# Altium PCB XEM7310_Breakout.PcbDoc (part 1 of 3)
Units mm, origin at the board's own origin, x right, y up, seen from the top; angles counter-clockwise.
Board outline 151.89 x 165.35 mm, 4 copper layers (Top, Ground Plane, Power Plane, Bottom), stack 1.562 mm thick; 68 components, 204 nets, 832 pads, 382 vias.
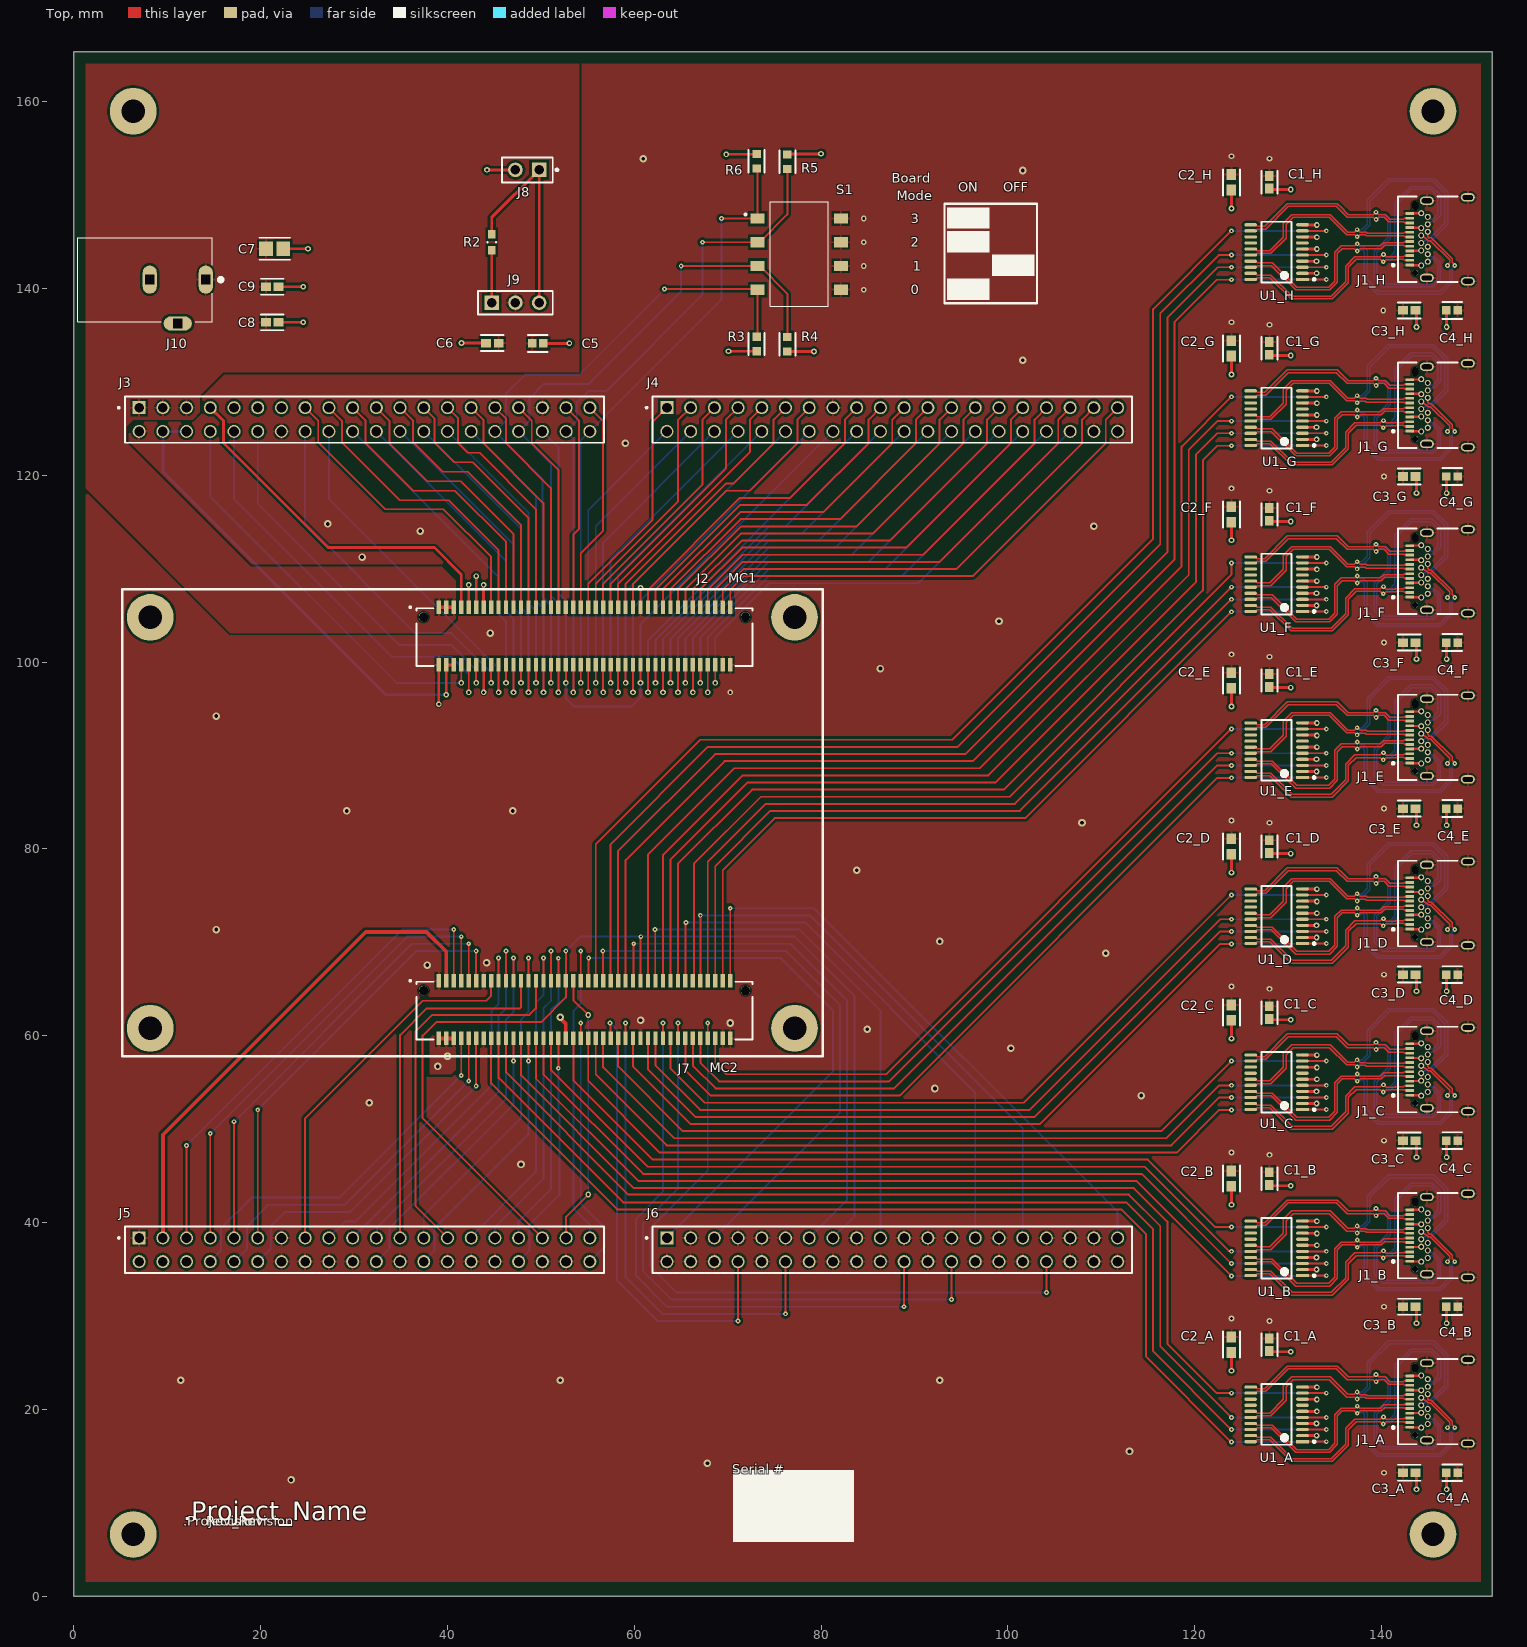
[diagram p0: Top view]
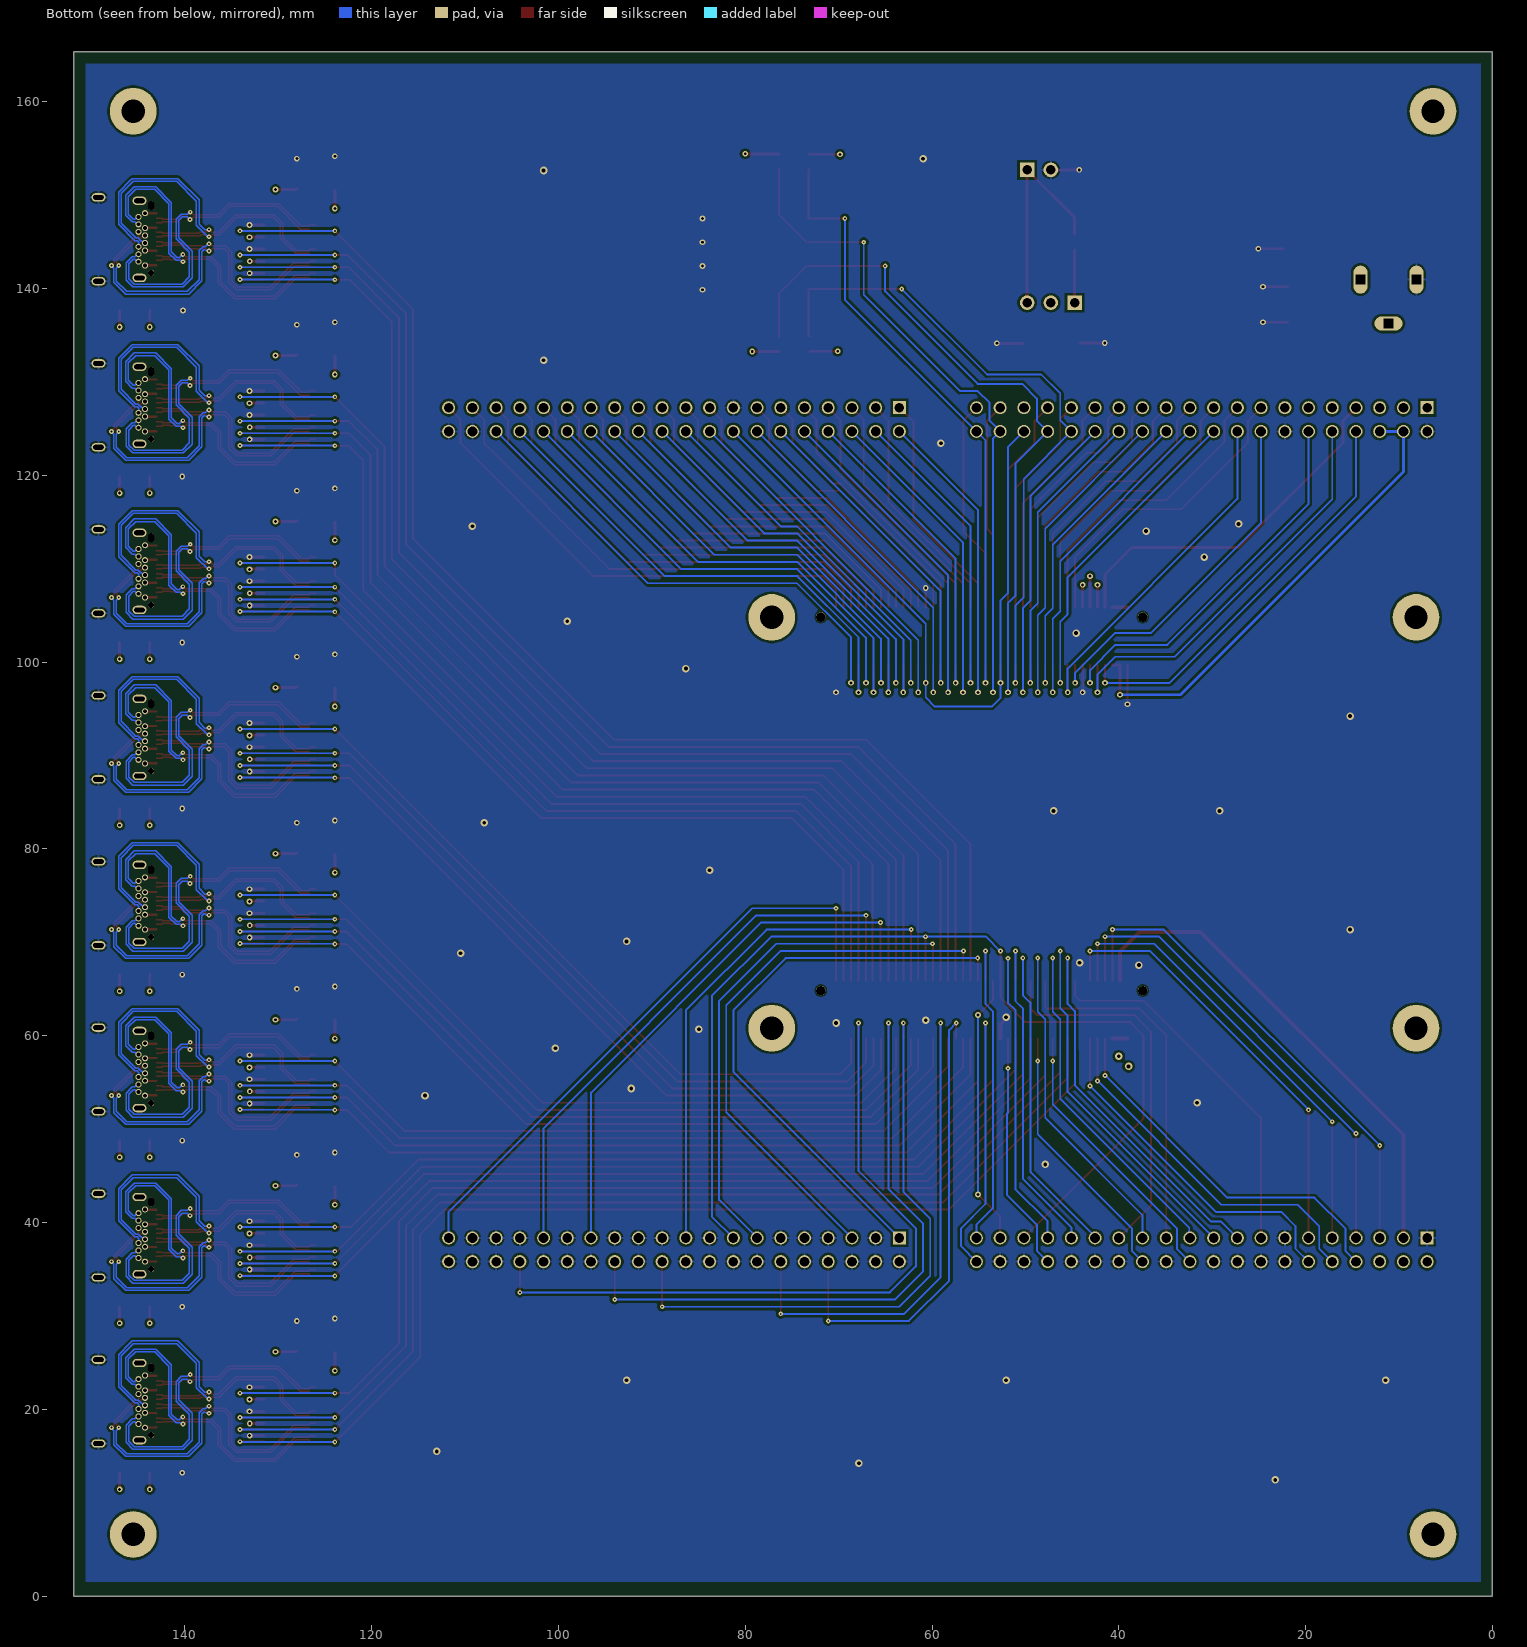
[diagram p1: Bottom view, seen from below]
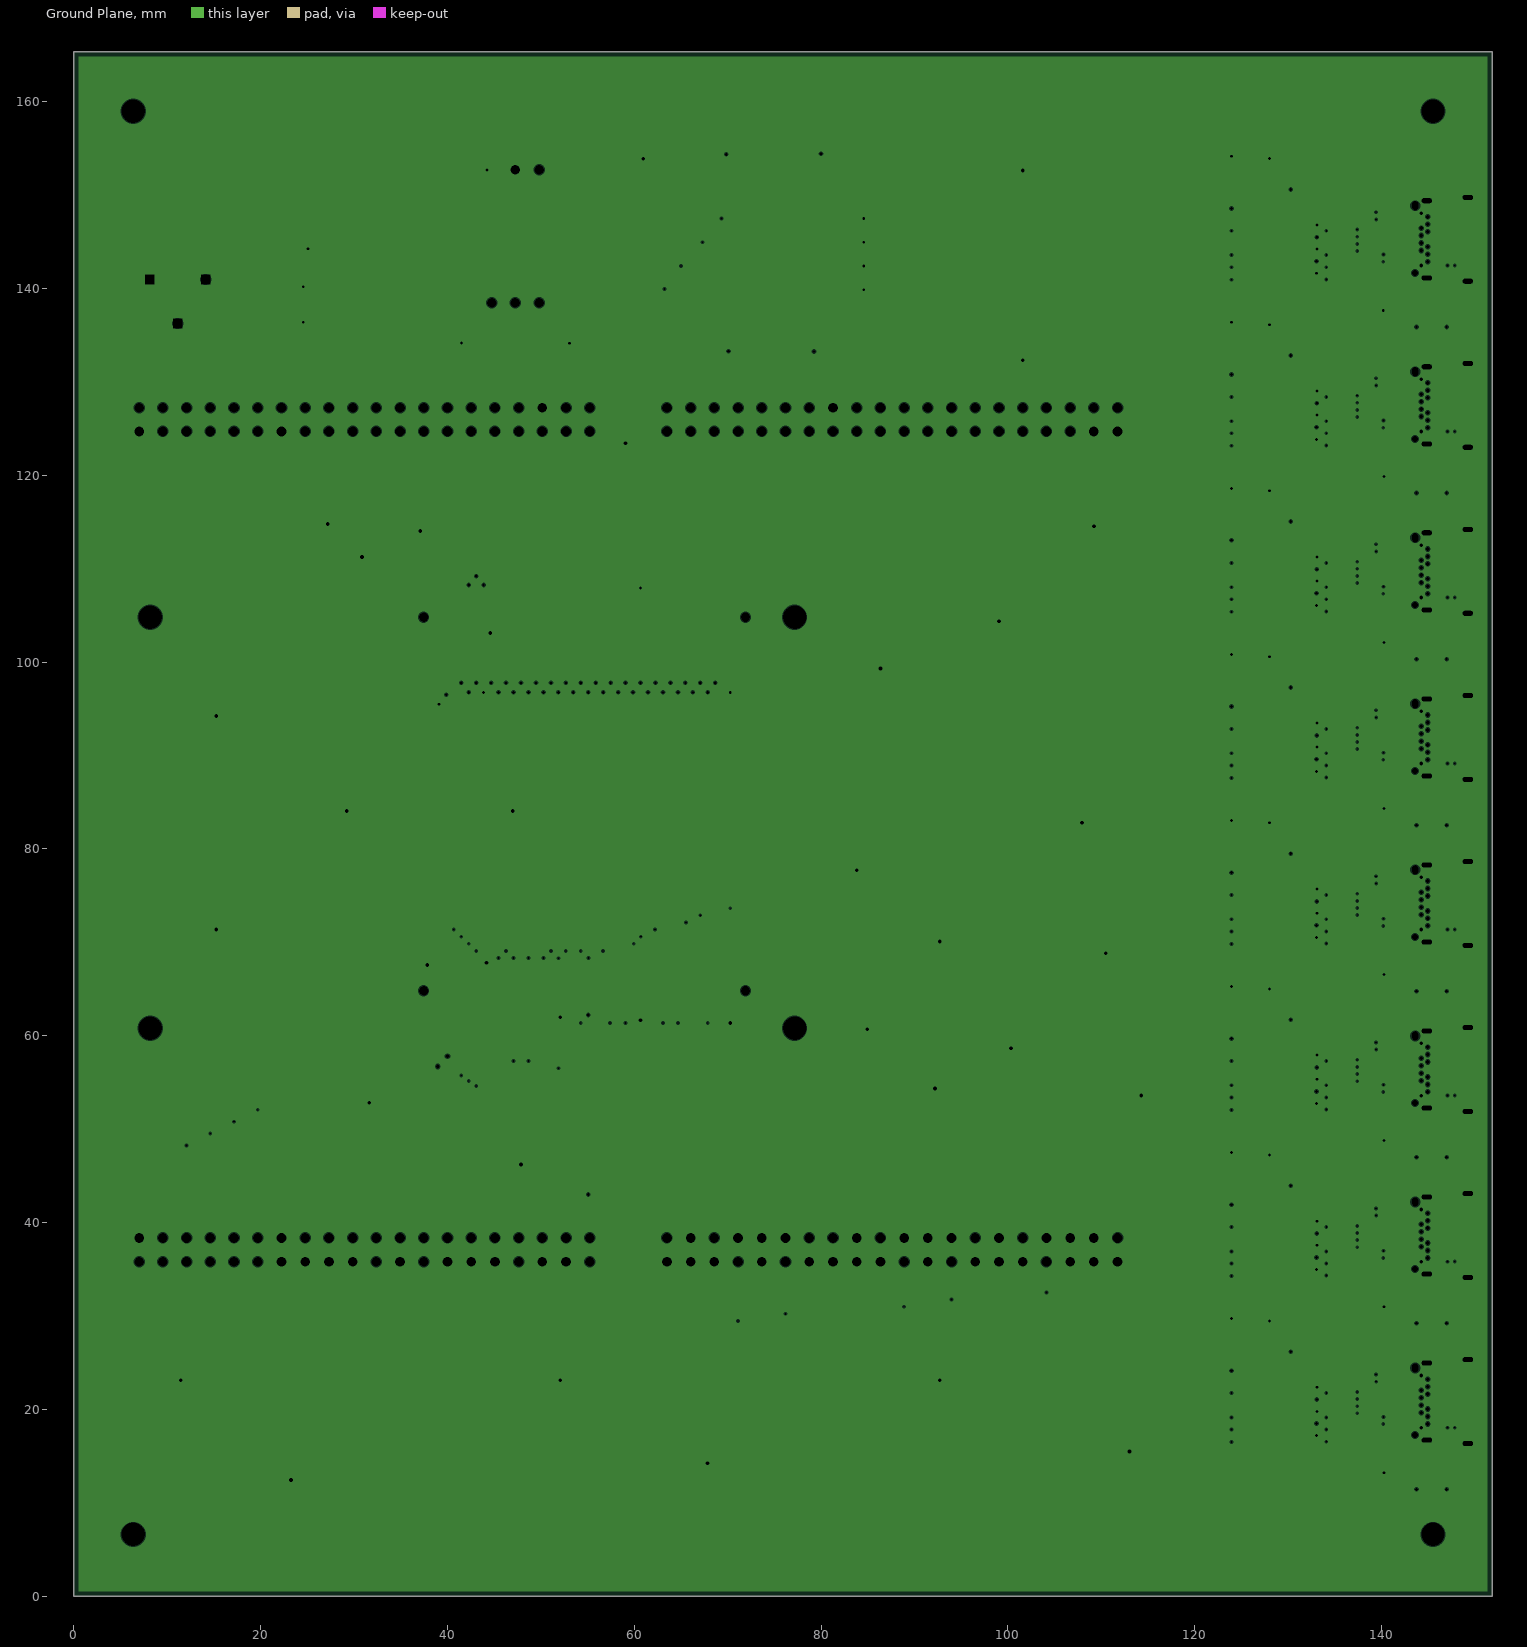
[diagram p2: Ground Plane, clearances drawn from the general rule]
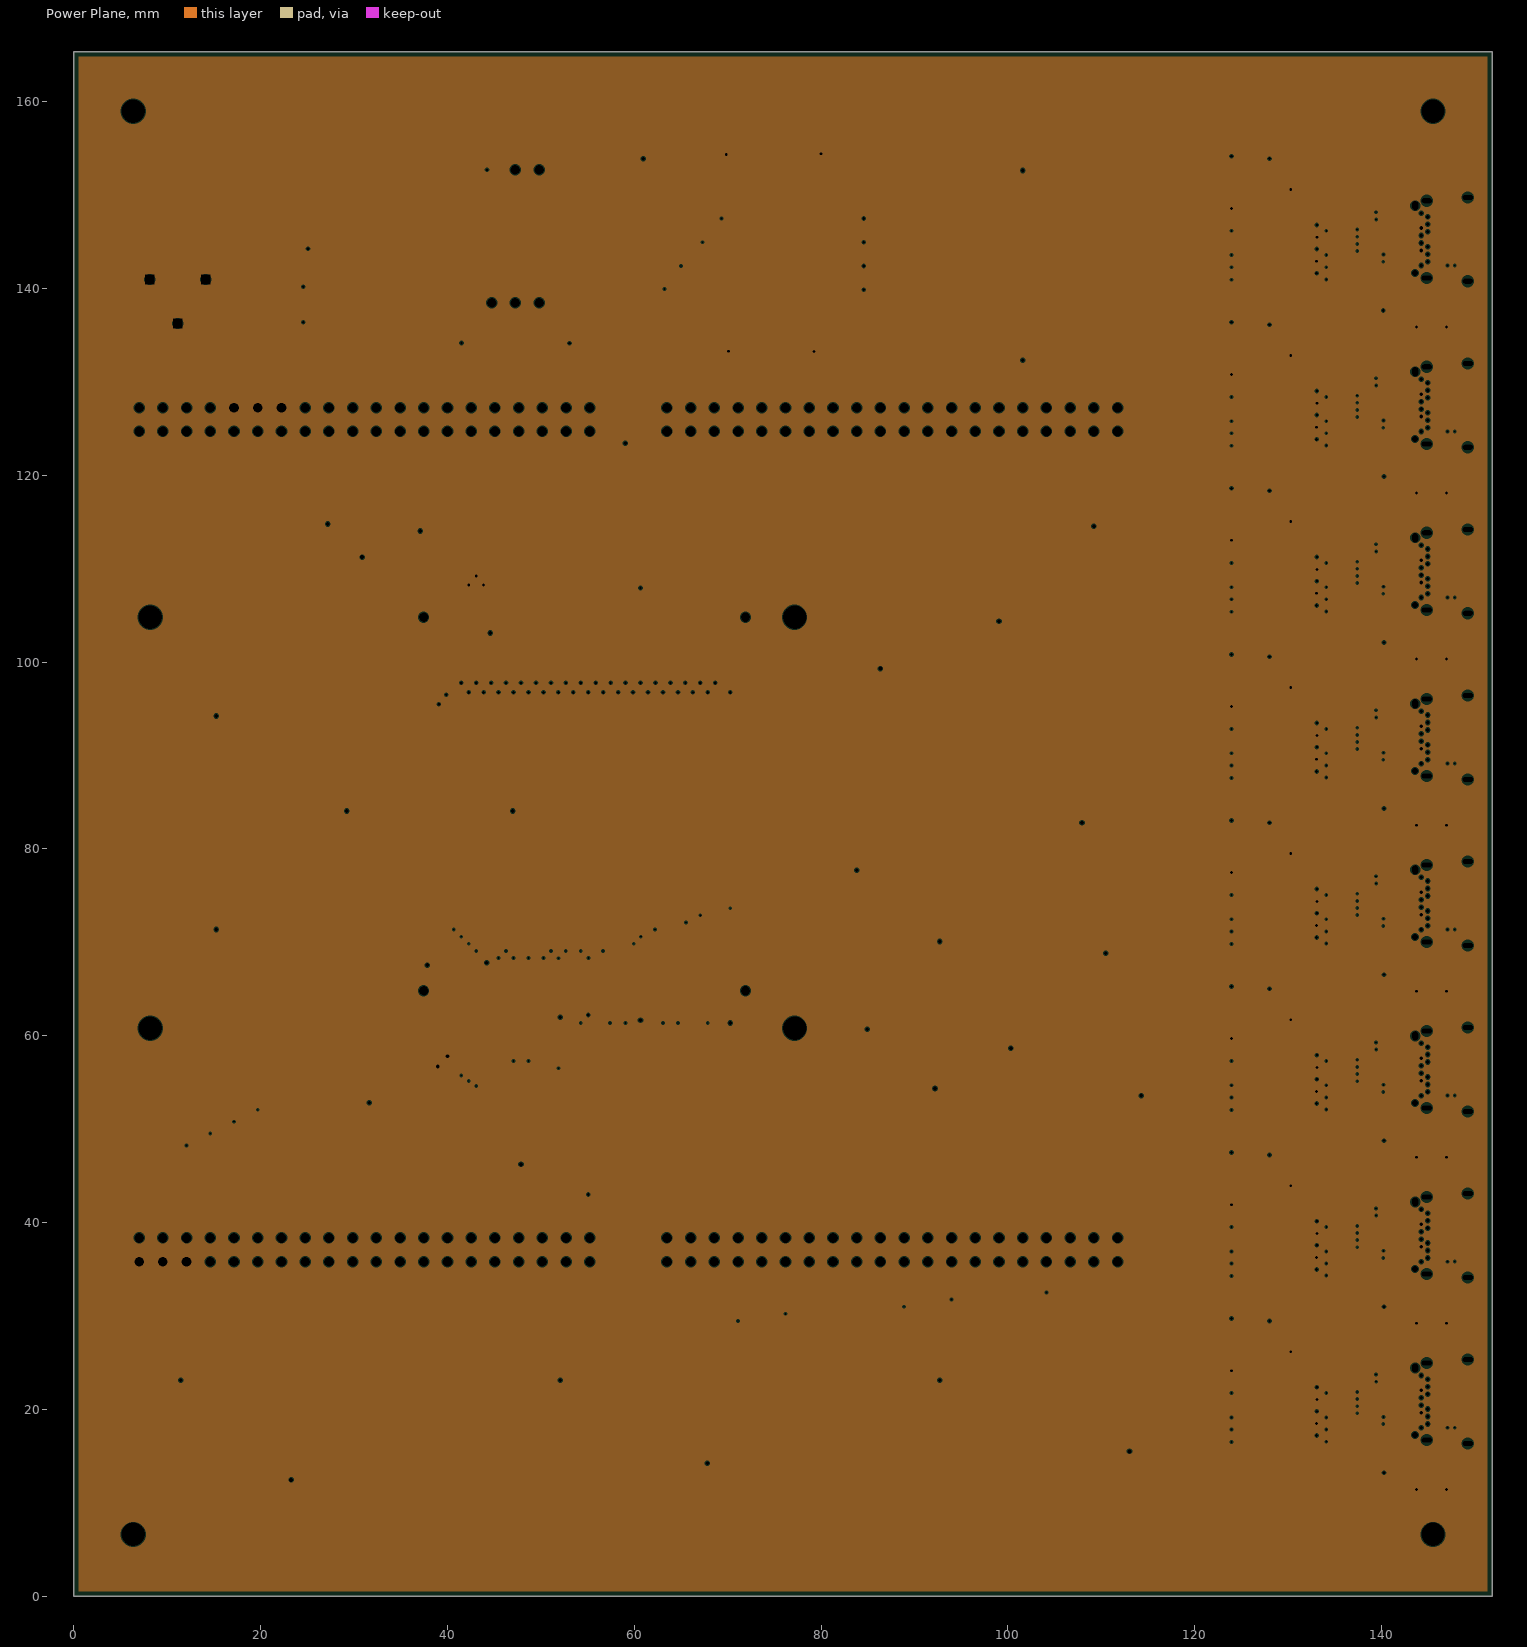
[diagram p3: Power Plane, clearances drawn from the general rule]
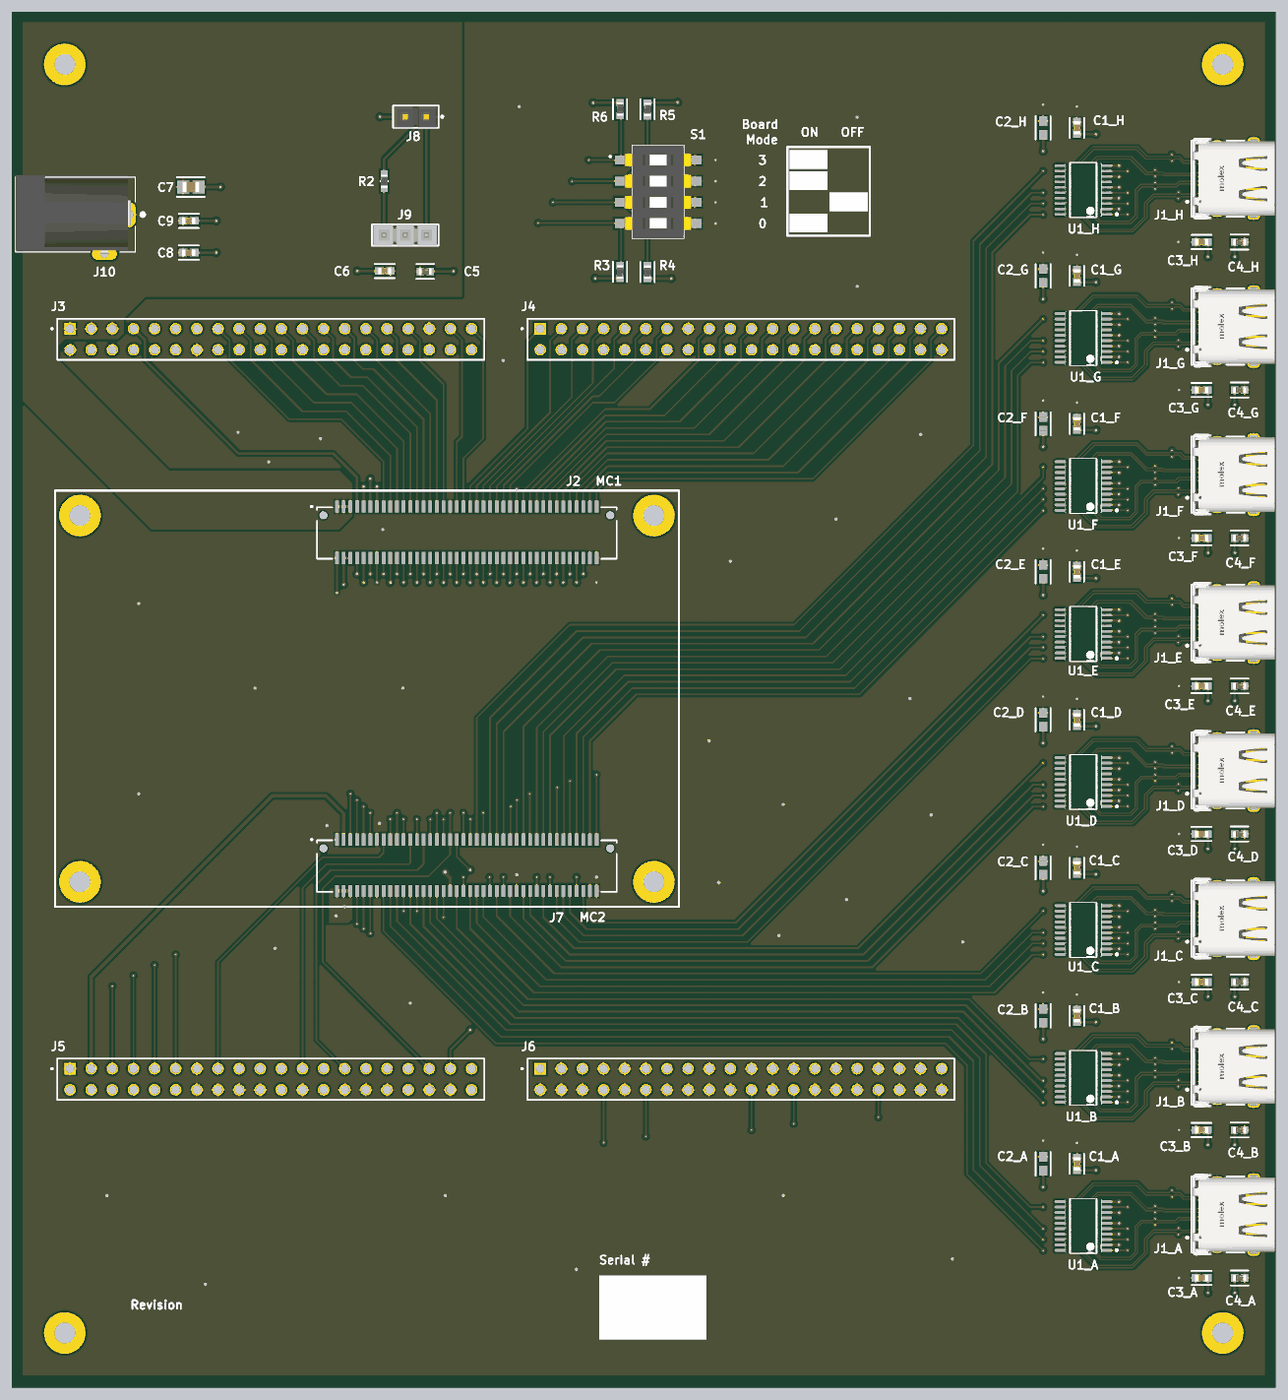
[diagram p6: 3D render of the assembled board from above, using the file's embedded part models]

## Layer stack, top to bottom
Top Solder: solder mask 0.0102, Solder Resist, Dk 3.5
Top: signal copper 0.035
Dielectric 1: prepreg 0.196, FR-4, Dk 4.74
Ground Plane: plane copper 0.035, net GND
Dielectric 3: core 1.03, Dk 4.6
Power Plane: plane copper 0.035, net 3V3
Dielectric 4: prepreg 0.196, Dk 4.74
Bottom: signal copper 0.035
Bottom Solder: solder mask 0.0102, Solder Resist, Dk 3.5

## Board outline
0,165.354 151.892,165.354 151.892,0 0,0

## Design rules (kind name [scope] priority, off if disabled: settings)
BoardOutlineClearance [All] p1: gap=0.2 ignorepadtopadclearanceinfootprint=FALSE
Clearance Clearance_1 [InComponentClass('USB') vs InComponentClass('USB')] p1: gap=0.102 ignorepadtopadclearanceinfootprint=TRUE
Clearance Diff_Clearance [InDifferentialPairClass('LVDS_SPI') vs InDifferentialPairClass('LVDS_SPI')] p2: gap=0.254 ignorepadtopadclearanceinfootprint=TRUE except(0.127: Arc-Arc Arc-Track Track-Track)
Clearance [All] p3: gap=0.152 ignorepadtopadclearanceinfootprint=TRUE except(0.254: Arc-Arc Arc-Track Arc-Fill Arc-Poly Arc-Region Track-Track Track-Fill Track-Poly Track-Region SMDPad-Fill SMDPad-Poly SMDPad-Region THPad-Fill THPad-Poly THPad-Region Via-Fill Via-Poly Via-Region Fill-Fill Fill-Poly Fill-Region Poly-Poly Poly-Region Region-Region)
ComponentClearance [All] p1: gap=0.254 collisioncheckmode=3 verticalgap=0.254 showdistances=TRUE
DiffPairsRouting [InDifferentialPairClass('LVDS_SPI')] p1: maxlimit=0.127 minlimit=0.127 mostfreqgap=0.127 toplayer_minwidth=0.16 toplayer_maxwidth=0.16 toplayer_prefwidth=0.16 bottomlayer_minwidth=0.16 bottomlayer_maxwidth=0.16 bottomlayer_prefwidth=0.16 impedanceprofiledriven=TRUE impedanceprofileid={1ED248B1-CE5C-4CD3-9082-4E048037D57D} impedanceprofilevalue=100.000000 maxuncoupledlength=0.762
Height [All] p1: minheight=0 maxheight=1816.048 prefheight=12.7
HoleSize [All] p1: absolutevalues=TRUE maxlimit=6.3 minlimit=0.2 maxpercent=80.000 minpercent=20.000
HoleToHoleClearance [All] p1: gap=0.254 allowstackedmicrovias=FALSE
Length [InDifferentialPairClass('LVDS_SPI')] p1: maxlimit=2540 minlimit=0.254
MinimumAnnularRing USB_TH [InComponentClass('USB')] p1: minimumring=0.102
MinimumAnnularRing [All] p2: minimumring=0.152
MinimumSolderMaskSliver MinimumSolderMaskSliver_1 [InComponentClass('USB') vs InComponentClass('USB')] p1: minsoldermaskwidth=0.127
MinimumSolderMaskSliver [All] p2: minsoldermaskwidth=0.152
PlaneClearance [All] p1: clearance=0.102
PlaneConnect PlaneConnectPowerPads [InPadClass('PowerPads')] p1: planeconnectstyle=Direct reliefexpansion=0.508 reliefentries=4 reliefconductorwidth=0.254 reliefairgap=0.254
PlaneConnect [All] p2: pad.planeconnectstyle=Relief pad.reliefexpansion=0.3 pad.reliefentries=4 pad.reliefconductorwidth=0.102 pad.reliefairgap=0.102 via.planeconnectstyle=Direct via.reliefexpansion=0.3 via.reliefentries=4 via.reliefconductorwidth=0.127 via.reliefairgap=0.127
PolygonConnect PolygonConnectPowerPads [All vs (InPadClass('PowerPads'))] p1: connectstyle=Direct reliefconductorwidth=0.254 reliefentries=4 polygonreliefangle="90 Angle" airgapwidth=0.254
PolygonConnect [All] p2: thpad.connectstyle=Relief thpad.reliefconductorwidth=0.254 thpad.reliefentries=4 thpad.polygonreliefangle="90 Angle" thpad.airgapwidth=0.203 smdpad.connectstyle=Relief smdpad.reliefconductorwidth=0.254 smdpad.reliefentries=4 smdpad.polygonreliefangle="90 Angle" smdpad.airgapwidth=0.203 via.connectstyle=Direct via.reliefconductorwidth=0.127 via.reliefentries=4 via.polygonreliefangle="90 Angle" via.airgapwidth=0.127
RoutingVias Diff_Vias [InDifferentialPairClass('LVDS_SPI')] p1: holewidth=0.203 width=0.457 viastyle="Through Hole" minholewidth=0.203 minwidth=0.457 maxholewidth=0.203 maxwidth=0.457
RoutingVias [All] p2: holewidth=0.305 width=0.61 viastyle="Through Hole" minholewidth=0.254 minwidth=0.508 maxholewidth=0.406 maxwidth=0.813
SilkToSilkClearance [All] p1: silktosilkclearance=0.127
SilkToSolderMaskClearance [IsPad] p1: minsilkscreentomaskgap=0.127 clearancetoexposedcopper=TRUE
SolderMaskExpansion [All] p1: expansion=0.051 istentingtop=FALSE
SupplyNets "Schematic Supply Nets_7" [InNet('1V0')] p1: voltage=0.000
SupplyNets "Schematic Supply Nets_6" [InNet('5V0')] p2: voltage=0.000
SupplyNets "Schematic Supply Nets_5" [InNet('VCCO_MC2')] p3: voltage=0.000
SupplyNets "Schematic Supply Nets_4" [InNet('VCCO_MC1')] p4: voltage=0.000
SupplyNets "Schematic Supply Nets_3" [InNet('1V8')] p5: voltage=0.000
SupplyNets "Schematic Supply Nets_2" [InNet('3V3')] p6: voltage=0.000
SupplyNets "Schematic Supply Nets_1" [InNet('GND')] p7: voltage=0.000
UnRoutedNet [All] p1: checkbadconnections=TRUE
Width 5V0_Width [InNet('5V0')] p1: maxlimit=2.54 minlimit=0.254 preferedwidth=0.508 minimp=50.000000 maximp=50.000000 favimp=50.000000
Width General [InNetClass('SE_Signals')] p2: maxlimit=0.508 minlimit=0.127 preferedwidth=0.203 minimp=50.000000 maximp=50.000000 favimp=50.000000
Width 3V3_Width [InNet('3V3')] p3: maxlimit=2.54 minlimit=0.254 preferedwidth=0.508
Width GND_Width [InNet('GND')] p4: maxlimit=2.54 minlimit=0.254 preferedwidth=0.508 minimp=50.000000 maximp=50.000000 favimp=50.000000
19 further rules are at their usual default settings.

## Classes and differential pairs
component class USB: J1_A J1_B J1_C J1_D J1_E J1_F J1_G J1_H
net class USB_TH: 3V3 C\S\_A_N C\S\_A_P C\S\_B_N C\S\_B_P C\S\_C_N C\S\_C_P C\S\_D_N C\S\_D_P C\S\_E_N C\S\_E_P C\S\_F_N C\S\_F_P C\S\_G_N C\S\_G_P C\S\_H_N C\S\_H_P GND MISO_A_N MISO_A_P MISO_B_N MISO_B_P MISO_C_N MISO_C_P MISO_D_N MISO_D_P MISO_E_N MISO_E_P MISO_F_N MISO_F_P MISO_G_N MISO_G_P MISO_H_N MISO_H_P MOSI_A_N MOSI_A_P MOSI_B_N MOSI_B_P MOSI_C_N MOSI_C_P MOSI_D_N MOSI_D_P MOSI_E_N MOSI_E_P MOSI_F_N MOSI_F_P MOSI_G_N MOSI_G_P MOSI_H_N MOSI_H_P SCLK_A_N SCLK_A_P SCLK_B_N SCLK_B_P SCLK_C_N SCLK_C_P SCLK_D_N SCLK_D_P SCLK_E_N SCLK_E_P SCLK_F_N SCLK_F_P SCLK_G_N SCLK_G_P SCLK_H_N SCLK_H_P
net class SE_Signals: board_mode_0 board_mode_1 board_mode_2 board_mode_3 C\S\_A C\S\_B C\S\_C C\S\_D C\S\_E C\S\_F C\S\_G C\S\_H FPGA_TCK FPGA_TDI FPGA_TDO FPGA_TMS MC1_15 MC1_16 MC1_17 MC1_18 MC1_19 MC1_20 MC1_21 MC1_22 MC1_23 MC1_24 MC1_25 MC1_26 MC1_27 MC1_28 MC1_29 MC1_30 MC1_31 MC1_33 MC1_37 MC1_39 MC1_41 MC1_42 MC1_43 MC1_44 MC1_45 MC1_46 MC1_47 MC1_48 MC1_49 MC1_50 MC1_51 MC1_52 MC1_53 MC1_54 MC1_57 MC1_58 MC1_59 MC1_60 MC1_61 MC1_62 MC1_63 MC1_64 MC1_65 MC1_66 MC1_67 MC1_68 MC1_69 MC1_70 MC1_72 MC1_74 MC1_76 MC1_77 MC1_79 MC2_10 MC2_12 MC2_15 MC2_17 MC2_19 MC2_21 MC2_22 MC2_23 MC2_25 MC2_27 MC2_29 MC2_31 MC2_33 MC2_34 MC2_37 MC2_39 MC2_45 MC2_48 MC2_59 MC2_62 MC2_71 MC2_74 MISO_A2 MISO_B2 MISO_C2 MISO_D2 MISO_E2 MISO_F2 MISO_G2 MISO_H2 MOSI_A MOSI_B MOSI_C MOSI_D MOSI_E MOSI_F MOSI_G MOSI_H NetJ8_1 NetJ9_1 SCLK_A SCLK_B SCLK_C SCLK_D SCLK_E SCLK_F SCLK_G SCLK_H status_led_1 status_led_2 status_led_3 SYS_CLK_MC1 SYS_CLK_MC2 XADC_VN XADC_VP
differential pair class LVDS_SPI: C\S\_A C\S\_B C\S\_C C\S\_D C\S\_E C\S\_F C\S\_G C\S\_H MISO_A MISO_B MISO_C MISO_D MISO_E MISO_F MISO_G MISO_H MOSI_A MOSI_B MOSI_C MOSI_D MOSI_E MOSI_F MOSI_G MOSI_H SCLK_A SCLK_B SCLK_C SCLK_D SCLK_E SCLK_F SCLK_G SCLK_H
channel class Intan_Interface: A B C D E F G H
component class U_Onboard_IO: C5 C6 C7 C8 C9 J8 J9 J10 R2 R3 R4 R5 R6 S1
component class U_FPGA: J2 J3 J4 J5 J6 J7
component class H: C1_H C2_H C3_H C4_H J1_H U1_H
component class G: C1_G C2_G C3_G C4_G J1_G U1_G
component class F: C1_F C2_F C3_F C4_F J1_F U1_F
component class E: C1_E C2_E C3_E C4_E J1_E U1_E
component class D: C1_D C2_D C3_D C4_D J1_D U1_D
component class C: C1_C C2_C C3_C C4_C J1_C U1_C
component class B: C1_B C2_B C3_B C4_B J1_B U1_B
component class A: C1_A C2_A C3_A C4_A J1_A U1_A
differential pair SCLK_H: +SCLK_H_P -SCLK_H_N
differential pair SCLK_G: +SCLK_G_P -SCLK_G_N
differential pair SCLK_F: +SCLK_F_P -SCLK_F_N
differential pair SCLK_E: +SCLK_E_P -SCLK_E_N
differential pair SCLK_D: +SCLK_D_P -SCLK_D_N
differential pair SCLK_C: +SCLK_C_P -SCLK_C_N
differential pair SCLK_B: +SCLK_B_P -SCLK_B_N
differential pair SCLK_A: +SCLK_A_P -SCLK_A_N
differential pair MOSI_H: +MOSI_H_P -MOSI_H_N
differential pair MOSI_G: +MOSI_G_P -MOSI_G_N
differential pair MOSI_F: +MOSI_F_P -MOSI_F_N
differential pair MOSI_E: +MOSI_E_P -MOSI_E_N
differential pair MOSI_D: +MOSI_D_P -MOSI_D_N
differential pair MOSI_C: +MOSI_C_P -MOSI_C_N
differential pair MOSI_B: +MOSI_B_P -MOSI_B_N
differential pair MOSI_A: +MOSI_A_P -MOSI_A_N
differential pair MISO_H: +MISO_H_P -MISO_H_N
differential pair MISO_G: +MISO_G_P -MISO_G_N
differential pair MISO_F: +MISO_F_P -MISO_F_N
differential pair MISO_E: +MISO_E_P -MISO_E_N
differential pair MISO_D: +MISO_D_P -MISO_D_N
differential pair MISO_C: +MISO_C_P -MISO_C_N
differential pair MISO_B: +MISO_B_P -MISO_B_N
differential pair MISO_A: +MISO_A_P -MISO_A_N
differential pair C\S\_H: +C\S\_H_P -C\S\_H_N
differential pair C\S\_G: +C\S\_G_P -C\S\_G_N
differential pair C\S\_F: +C\S\_F_P -C\S\_F_N
differential pair C\S\_E: +C\S\_E_P -C\S\_E_N
differential pair C\S\_D: +C\S\_D_P -C\S\_D_N
differential pair C\S\_C: +C\S\_C_P -C\S\_C_N
differential pair C\S\_B: +C\S\_B_P -C\S\_B_N
differential pair C\S\_A: +C\S\_A_P -C\S\_A_N

## Components (designator, comment, footprint, x,y, rotation, side; value= is the part's Value field where it differs from the comment)
C1_A "0.1uF" FP-CC0603-DA-IPC_B 128.016,26.924 r90 top value="100 nF" (schematic designator C1)
C1_B "0.1uF" FP-CC0603-DA-IPC_B 128.016,44.704 r90 top value="100 nF" (schematic designator C1)
C1_C "0.1uF" FP-CC0603-DA-IPC_B 128.016,62.484 r90 top value="100 nF" (schematic designator C1)
C1_D "0.1uF" FP-CC0603-DA-IPC_B 128.016,80.264 r90 top value="100 nF" (schematic designator C1)
C1_E "0.1uF" FP-CC0603-DA-IPC_B 128.016,98.044 r90 top value="100 nF" (schematic designator C1)
C1_F "0.1uF" FP-CC0603-DA-IPC_B 128.016,115.824 r90 top value="100 nF" (schematic designator C1)
C1_G "0.1uF" FP-CC0603-DA-IPC_B 128.016,133.604 r90 top value="100 nF" (schematic designator C1)
C1_H "0.1uF" FP-CC0603-DA-IPC_B 128.016,151.384 r90 top value="100 nF" (schematic designator C1)
C2_A "1nF" FP-CL10-IPC_A 123.952,26.924 r270 top (schematic designator C2)
C2_B "1nF" FP-CL10-IPC_A 123.952,44.704 r270 top (schematic designator C2)
C2_C "1nF" FP-CL10-IPC_A 123.952,62.484 r270 top (schematic designator C2)
C2_D "1nF" FP-CL10-IPC_A 123.952,80.264 r270 top (schematic designator C2)
C2_E "1nF" FP-CL10-IPC_A 123.952,98.044 r270 top (schematic designator C2)
C2_F "1nF" FP-CL10-IPC_A 123.952,115.824 r270 top (schematic designator C2)
C2_G "1nF" FP-CL10-IPC_A 123.952,133.604 r270 top (schematic designator C2)
C2_H "1nF" FP-CL10-IPC_A 123.952,151.384 r270 top (schematic designator C2)
C3_A "0.1uF" FP-CC0603-DA-IPC_B 143.002,13.208 r180 top value="100 nF" (schematic designator C3)
C3_B "0.1uF" FP-CC0603-DA-IPC_B 143.002,30.988 r180 top value="100 nF" (schematic designator C3)
C3_C "0.1uF" FP-CC0603-DA-IPC_B 143.002,48.768 r180 top value="100 nF" (schematic designator C3)
C3_D "0.1uF" FP-CC0603-DA-IPC_B 143.002,66.548 r180 top value="100 nF" (schematic designator C3)
C3_E "0.1uF" FP-CC0603-DA-IPC_B 143.002,84.328 r180 top value="100 nF" (schematic designator C3)
C3_F "0.1uF" FP-CC0603-DA-IPC_B 143.002,102.108 r180 top value="100 nF" (schematic designator C3)
C3_G "0.1uF" FP-CC0603-DA-IPC_B 143.002,119.888 r180 top value="100 nF" (schematic designator C3)
C3_H "0.1uF" FP-CC0603-DA-IPC_B 143.002,137.668 r180 top value="100 nF" (schematic designator C3)
C4_A "10 uF" FP-GRM188-0_2-IPC_C 147.574,13.208 r0 top (schematic designator C4)
C4_B "10 uF" FP-GRM188-0_2-IPC_C 147.574,30.988 r0 top (schematic designator C4)
C4_C "10 uF" FP-GRM188-0_2-IPC_C 147.574,48.768 r0 top (schematic designator C4)
C4_D "10 uF" FP-GRM188-0_2-IPC_C 147.574,66.548 r0 top (schematic designator C4)
C4_E "10 uF" FP-GRM188-0_2-IPC_C 147.574,84.328 r0 top (schematic designator C4)
C4_F "10 uF" FP-GRM188-0_2-IPC_C 147.574,102.108 r0 top (schematic designator C4)
C4_G "10 uF" FP-GRM188-0_2-IPC_C 147.574,119.888 r0 top (schematic designator C4)
C4_H "10 uF" FP-GRM188-0_2-IPC_C 147.574,137.668 r0 top (schematic designator C4)
C5 "10 uF" FP-GRM188-0_2-IPC_C 49.678,134.133 r0 top
C6 "0.1uF" FP-CC0603-DA-IPC_B 44.81,134.176 r180 top value="100 nF"
C7 "22uF" FP-GRM21B-0_2-e0_2_0_7-IPC_A 21.5,144.272 r0 top
C8 "1uF" FP-CC0603-DA-IPC_B 21.251,136.398 r0 top value="1 uF"
C9 "0.1uF" FP-CC0603-DA-IPC_B 21.251,140.208 r0 top value="100 nF"
J1_A "217183-0001" FP-217183-0001-MFG 146.858,20.828 r90 top locked (schematic designator J1)
J1_B "217183-0001" FP-217183-0001-MFG 146.858,38.608 r90 top locked (schematic designator J1)
J1_C "217183-0001" FP-217183-0001-MFG 146.858,56.388 r90 top locked (schematic designator J1)
J1_D "217183-0001" FP-217183-0001-MFG 146.858,74.168 r90 top locked (schematic designator J1)
J1_E "217183-0001" FP-217183-0001-MFG 146.858,91.948 r90 top locked (schematic designator J1)
J1_F "217183-0001" FP-217183-0001-MFG 146.858,109.728 r90 top locked (schematic designator J1)
J1_G "217183-0001" FP-217183-0001-MFG 146.858,127.508 r90 top locked (schematic designator J1)
J1_H "217183-0001" FP-217183-0001-MFG 146.858,145.288 r90 top locked (schematic designator J1)
J2 "BTE-040-01-F-D-A" SAMTEC_BTE-040-01-F-D-A 54.677,102.802 r0 top locked
J3 "SSW-120-01-F-D" SAMTEC_SSW-120-01-F-D 6.985,127.254 r180 top locked
J4 "SSW-120-01-F-D" SAMTEC_SSW-120-01-F-D 63.5,127.254 r180 top
J5 "SSW-120-01-F-D" SAMTEC_SSW-120-01-F-D 6.985,38.354 r180 top locked
J6 "SSW-120-01-F-D" SAMTEC_SSW-120-01-F-D 63.5,38.354 r180 top locked
J7 "BTE-040-01-F-D-A" SAMTEC_BTE-040-01-F-D-A 54.677,62.802 r0 top locked
J8 "TSW-102-07-F-S" FP-TSW-102-07-F-S-MFG 48.552,152.722 r180 top
J9 "TSW-103-07-F-S" SMTC-TSW-103-07-X-S 44.742,138.498 r0 top
J10 "PJ-102AH" CUI_PJ-102AH 7.62,140.97 r180 top
R2 "0R" FP-RC0603-MFG 44.742,144.975 r90 top value=0Ω
R3 "10K0" FP-RC0603-0_55-IPC_B 73.097,134.077 r270 top
R4 "10K0" FP-RC0603-0_55-IPC_B 76.399,134.051 r270 top
R5 "10K0" FP-RC0603-0_55-IPC_B 76.399,153.609 r90 top
R6 "10K0" FP-RC0603-0_55-IPC_B 73.097,153.635 r90 top
S1 "DS04-254-2-04BK-SMT-TR" SW_DS04-254-2-04BK-SMT-TR 77.669,143.703 r0 top
U1_A "SN65LVDT41PW" FP-PW0020A-IPC_C 128.778,19.459 r180 top (schematic designator U1)
U1_B "SN65LVDT41PW" FP-PW0020A-IPC_C 128.778,37.239 r180 top locked (schematic designator U1)
U1_C "SN65LVDT41PW" FP-PW0020A-IPC_C 128.778,55.019 r180 top locked (schematic designator U1)
U1_D "SN65LVDT41PW" FP-PW0020A-IPC_C 128.778,72.799 r180 top locked (schematic designator U1)
U1_E "SN65LVDT41PW" FP-PW0020A-IPC_C 128.778,90.579 r180 top locked (schematic designator U1)
U1_F "SN65LVDT41PW" FP-PW0020A-IPC_C 128.778,108.359 r180 top locked (schematic designator U1)
U1_G "SN65LVDT41PW" FP-PW0020A-IPC_C 128.778,126.139 r180 top locked (schematic designator U1)
U1_H "SN65LVDT41PW" FP-PW0020A-IPC_C 128.778,143.919 r180 top locked (schematic designator U1)

## Footprints (in the part's own frame and the unit in brackets; to place one, negate y for a bottom-side part, rotate by r counter-clockwise, add the part's x,y. Pads: shape width x height; smd on the part's side, far side on the other; paste and mask are expansions set on the pad)
CUI_PJ-102AH [mm]
  oval 1.508x3.016 hole 1 square: 1(-6.5,0) 2(-0.5,0)
  oval 3.016x1.508 hole 1 square: 3(-3.5,4.7)
  silkscreen extent -8.3,-4.5 7.2,4.5, body extent -7.2,-4.7 7.2,4.7, height 4.5
FP-217183-0001-MFG [mm]
  rrect100% 0.9x1.5 hole 1.1 slot 0.5 at 0 deg paste-2539.97 mask+0: 1(-4.13,1.985) 2(4.13,1.985) 3(-4.49,-2.405) 4(4.49,-2.405)
  rect 0.3x0.9 smd paste+0 mask+0.025: A1(-2.75,3.795) A2(-2.25,3.795) A3(-1.75,3.795) A4(-1.25,3.795) A5(-0.75,3.795) A6(-0.25,3.795) A7(0.25,3.795) A8(0.75,3.795) A9(1.25,3.795) A10(1.75,3.795) A11(2.25,3.795) A12(2.75,3.795)
  round 0.65 hole 0.4 paste-2539.97 mask+0: B1(2.8,2.585) B2(2.4,1.885) B3(1.6,1.885) B4(1.2,2.585) B5(0.8,1.885) B6(0.4,2.585) B7(-0.4,2.585) B8(-0.8,1.885) B9(-1.2,2.585) B10(-1.6,1.885) B11(-2.4,1.885) B12(-2.8,2.585)
  round 0.65 hole 0.65 unplated paste-2539.97 mask+0: ""(-3.6,3.235)
  rrect100% 0.95x0.65 hole 0.65 slot 0.95 at 0 deg unplated paste-2539.97 mask+0: ""(3.6,3.235)
  silkscreen extent -4.57,-1.28 4.57,5.71, body extent -5.04,-5.19 5.04,5.19, height 0.25
FP-CC0603-DA-IPC_B [mm]
  rect 1.058x0.912 smd paste+0: 1(-0.677,0) 2(0.677,0)
  silkscreen extent -1.21,-0.86 1.21,0.86, body extent -1.46,-0.71 1.46,0.71, height 0.25
FP-CL10-IPC_A [mm]
  rect 1.158x1.012 smd paste+0: 1(-0.827,0) 2(0.827,0)
  silkscreen extent -1.41,-0.91 1.41,0.91, body extent -1.91,-1.01 1.91,1.01, height 0.25
FP-GRM21B-0_2-e0_2_0_7-IPC_A [mm]
  rect 1.455x1.556 smd paste+0: 1(-0.926,0) 2(0.926,0)
  silkscreen extent -1.65,-1.18 1.65,1.18, body extent -2.15,-1.28 2.15,1.28, height 0.25
FP-GRM188-0_2-IPC_C [mm]
  rect 0.905x0.906 smd paste+0: 1(-0.601,0) 2(0.601,0)
  silkscreen extent -1.05,-0.9 1.05,0.9, body extent -1.15,-0.6 1.15,0.6, height 0.25
FP-PW0020A-IPC_C [mm]
  rect 1.355x0.341 smd paste+0: 1(-2.775,2.925)
  rrect100% 1.355x0.341 smd paste+0: 2(-2.775,2.275) 3(-2.775,1.625) 4(-2.775,0.975) 5(-2.775,0.325) 6(-2.775,-0.325) 7(-2.775,-0.975) 8(-2.775,-1.625) 9(-2.775,-2.275) 10(-2.775,-2.925) 11(2.775,-2.925) 12(2.775,-2.275) 13(2.775,-1.625) 14(2.775,-0.975) 15(2.775,-0.325) 16(2.775,0.325) 17(2.775,0.975) 18(2.775,1.625) 19(2.775,2.275) 20(2.775,2.925)
  silkscreen extent -4.15,-3.25 1.6,3.25, body extent -3.55,-3.35 3.55,3.35, height 0.25
FP-RC0603-0_55-IPC_B [mm]
  rect 0.859x0.912 smd paste+0: 1(-0.777,0) 2(0.777,0)
  silkscreen extent -1.21,-0.86 1.21,0.86, body extent -1.46,-0.71 1.46,0.71, height 0.25
FP-RC0603-MFG [mm]
  rect 0.9x0.8 smd paste+0: 1(-0.85,0) 2(0.85,0)
  silkscreen extent -0.03,-0.45 0.03,0.45, body extent -1.4,-0.55 1.4,0.55, height 0.25
FP-TSW-102-07-F-S-MFG [mm]
  rect 1.57x1.57 hole 1.02 paste-2539.97 mask+0: 1(-1.27,0)
  round 1.57 hole 1.02 paste-2539.97 mask+0: 2(1.27,0)
  silkscreen extent -3.3,-1.34 2.73,1.34, body extent -2.83,-1.44 2.83,1.44, height 0.25
SAMTEC_BTE-040-01-F-D-A [mm]
  rect 0.457x1.44 smd: 01(-15.6,3.086) 02(-15.6,-3.086) 03(-14.8,3.086) 04(-14.8,-3.086) 05(-14,3.086) 06(-14,-3.086) 07(-13.2,3.086) 08(-13.2,-3.086) 09(-12.4,3.086) 10(-12.4,-3.086) 11(-11.6,3.086) 12(-11.6,-3.086) 13(-10.8,3.086) 14(-10.8,-3.086) 15(-10,3.086) 16(-10,-3.086) 17(-9.2,3.086) 18(-9.2,-3.086) 19(-8.4,3.086) 20(-8.4,-3.086) 21(-7.6,3.086) 22(-7.6,-3.086) 23(-6.8,3.086) 24(-6.8,-3.086) 25(-6,3.086) 26(-6,-3.086) 27(-5.2,3.086) 28(-5.2,-3.086) 29(-4.4,3.086) 30(-4.4,-3.086) 31(-3.6,3.086) 32(-3.6,-3.086) 33(-2.8,3.086) 34(-2.8,-3.086) 35(-2,3.086) 36(-2,-3.086) 37(-1.2,3.086) 38(-1.2,-3.086) 39(-0.4,3.086) 40(-0.4,-3.086) 41(0.4,3.086) 42(0.4,-3.086) 43(1.2,3.086) 44(1.2,-3.086) 45(2,3.086) 46(2,-3.086) 47(2.8,3.086) 48(2.8,-3.086) 49(3.6,3.086) 50(3.6,-3.086) 51(4.4,3.086) 52(4.4,-3.086) 53(5.2,3.086) 54(5.2,-3.086) 55(6,3.086) 56(6,-3.086) 57(6.8,3.086) 58(6.8,-3.086) 59(7.6,3.086) 60(7.6,-3.086) 61(8.4,3.086) 62(8.4,-3.086) 63(9.2,3.086) 64(9.2,-3.086) 65(10,3.086) 66(10,-3.086) 67(10.8,3.086) 68(10.8,-3.086) 69(11.6,3.086) 70(11.6,-3.086) 71(12.4,3.086) 72(12.4,-3.086) 73(13.2,3.086) 74(13.2,-3.086) 75(14,3.086) 76(14,-3.086) 77(14.8,3.086) 78(14.8,-3.086) 79(15.6,3.086) 80(15.6,-3.086)
  round 1.016 hole 1.016 unplated: ""(-17.238,2.032) ""(17.238,2.032)
  silkscreen extent -18.75,-3.19 18,3.19
SAMTEC_SSW-120-01-F-D [mm]
  rect 1.39x1.39 hole 1.04: 01(0,0)
  round 1.39 hole 1.04: 02(0,2.54) 03(-2.54,0) 04(-2.54,2.54) 05(-5.08,0) 06(-5.08,2.54) 07(-7.62,0) 08(-7.62,2.54) 09(-10.16,0) 10(-10.16,2.54) 11(-12.7,0) 12(-12.7,2.54) 13(-15.24,0) 14(-15.24,2.54) 15(-17.78,0) 16(-17.78,2.54) 17(-20.32,0) 18(-20.32,2.54) 19(-22.86,0) 20(-22.86,2.54) 21(-25.4,0) 22(-25.4,2.54) 23(-27.94,0) 24(-27.94,2.54) 25(-30.48,0) 26(-30.48,2.54) 27(-33.02,0) 28(-33.02,2.54) 29(-35.56,0) 30(-35.56,2.54) 31(-38.1,0) 32(-38.1,2.54) 33(-40.64,0) 34(-40.64,2.54) 35(-43.18,0) 36(-43.18,2.54) 37(-45.72,0) 38(-45.72,2.54) 39(-48.26,0) 40(-48.26,2.54)
  silkscreen extent -49.79,-1.21 2.27,3.75
SMTC-TSW-103-07-X-S [mm] ".025 SQ Post Terminal Strip Assembly, 1x3 Pins, Vertical, 2.54mm Pitch, Male"
  rect 1.55x1.55 hole 1.02: 1(0,0)
  round 1.55 hole 1.02: 2(2.54,0) 3(5.08,0)
  silkscreen extent -1.46,-1.27 6.54,1.27, body extent -1.27,-1.27 6.35,1.27, height 8.38
SW_DS04-254-2-04BK-SMT-TR [mm]
  rect 1.5x1.1 smd: 1A(-4.45,3.81) 1B(4.45,3.81) 2A(-4.45,1.27) 2B(4.45,1.27) 3A(-4.45,-1.27) 3B(4.45,-1.27) 4A(-4.45,-3.81) 4B(4.45,-3.81)
  silkscreen extent -5.85,-5.58 3.1,5.58, body extent -4.95,-5.57 4.95,5.59, height 3.09

## Part data
C1_A C1_B C1_C C1_D C1_E C1_F C1_G C1_H C3_A C3_B C3_C C3_D C3_E C3_F C3_G C3_H C6 C9: library part CAP_0U10_0603, "CAP CER 0.1UF 50V X7R 0603", Capacitance="100 nF", Manufacturer=YAGEO, Manufacturer Part Number=CC0603KRX7R9BB104, Package=CC0603-DA, Temperature="-55°C to +125°C", Temperature Characteristic=X7R, Temperature Coefficient=15%, Temperature Range High=+125°C, Temperature Range Low=-55°C, Tolerance=0.1, Voltage="50 V", Automotive=No, Category=Cap, ComponentLink2Description=Datasheet, ComponentLink2URL=http://www.yageo.com/documents/recent/UPY-GPHC_X7R_6.3V-to-50V_18.pdf, Device Class L1="Passive Components", Device Class L2=Capacitors, Device Class L3="Ceramic Capacitors", Digikey Description="CAP CER 0.1UF 50V X7R 0603", Footprint Url=http://www.yageo.com/exep/pages/download/literatures/UPY-C_GEN_24.pdf, Height=0.9mm, Lead Free=Yes, Material=Ceramic, Mouser Description="Multilayer Ceramic Capacitor, CC Series, 0.1 - F, - 10%, X7R, 50 V, 0603 [1608 Metric]", Octopart=https://octopart.com/cc0603krx7r9bb104-yageo-42244635, RoHS=TRUE, Voltage Rating="50 V"
C2_A C2_B C2_C C2_D C2_E C2_F C2_G C2_H: library part CAP_1N00_0603, "Cap Ceramic 1nF 50V X7R ±10% Pad SMD 0603 +125°C T/R", Case Code (Imperial)=0603, Case Code (Metric)=1608, Dielectric=X7R, Max Operating Temperature=125°C, Min Operating Temperature=-55°C, Package Quantity=1, Tolerance=10%, Voltage=50V, Capacitance=1nF, Case/Package=0603, Contact Plating=Tin, Depth=0.8mm, Height=0.8mm, Lead Free="Lead Free", Length=1.6mm, Material=Ceramic, Mount="Surface Mount", Packaging="Tape and Reel", Radiation Hardening=No, Thickness=0.035inch, Voltage Rating=50V, Voltage Rating (DC)=50V, Width=0.031inch
C4_A C4_B C4_C C4_D C4_E C4_F C4_G C4_H C5: library part CAP_10U0_0603, "Chip Multilayer Ceramic Capacitors for General Purpose, 0603, 10uF, X7R, 15%, 10%, 10V"
C7: library part CAP_22U0_0805, "Chip Multilayer Ceramic Capacitors for General Purpose, 0805, 22uF, X6S, 22%, 20%, 16V", Case Code (Imperial)=0805, Case Code (Metric)=2012, Dielectric=X6S, Max Operating Temperature=105°C, Min Operating Temperature=-55°C, Package Quantity=3000, Tolerance=20%, Voltage Rating=16V, Capacitance=22uF, Case/Package=0805, Height=1.25mm, Lead Free="Lead Free", Length=0.079inch, Mount="Surface Mount", Packaging="Tape and Reel", Termination=SMD/SMT, Thickness=0.057inch, Voltage Rating (DC)=16V, Weight=0.000335oz, Width=1.25mm
C8: library part CAP_1U00_0603, "CAP CER 1UF 16V X7R 0603", Capacitance="1 uF", Manufacturer=YAGEO, Manufacturer Part Number=CC0603KRX7R7BB105, Package=CC0603-DA, Temperature="-55°C to +125°C", Temperature Characteristic=X7R, Temperature Coefficient=15%, Temperature Range High=+125°C, Temperature Range Low=-55°C, Tolerance=0.1, Voltage="16 V", Automotive=No, Category=Cap, ComponentLink2Description=Datasheet, ComponentLink2URL=http://www.yageo.com/documents/recent/UPY-GPHC_X7R_6.3V-to-50V_18.pdf, Device Class L1="Passive Components", Device Class L2=Capacitors, Device Class L3="Ceramic Capacitors", Digikey Description="CAP CER 1UF 16V X7R 0603", Footprint Url=http://www.yageo.com/exep/pages/download/literatures/UPY-C_GEN_24.pdf, Height=0.9mm, Lead Free=Yes, Material=Ceramic, Mouser Description="Multilayer Ceramic Capacitor, CC Series, 1 - F, - 10%, X7R, 16 V, 0603 [1608 Metric]", Octopart=https://octopart.com/cc0603krx7r7bb105-yageo-42271928, RoHS=TRUE, Voltage Rating="16 V"
J1_A J1_B J1_C J1_D J1_E J1_F J1_G J1_H: library part CON_USBC_TH_SMT, "USB-C (USB TYPE-C) USB 3.2 Gen 1 (USB 3.1 Gen 1, Superspeed (USB 3.0)) Receptacle Connector 24 Position Through Hole, Right Angle"
J2 J7: library part CON_FPGA_SMD, "80 Position Connector Header, Outer Shroud Contacts Surface Mount Gold", Package=None, Availability=Unavailable, MF=Samtec, MP=BTE-040-01-F-D-A, Price=None
J3 J4 J5 J6: library part CON_HEADF_2X20, "40 Position Receptacle Connector 0.100\" (2.54mm) Through Hole Gold", Package=None, Availability=Unavailable, MF=Samtec, MP=SSW-120-01-F-D, Price=None
J8: library part CON_HEADM_1X2, "Connector Header Through Hole 2 position 0.100\" (2.54mm)", Color=Black, Flammability Rating="UL94 V-0", Max Current Rating=7.6A, Max Operating Temperature=125°C, Max Voltage Rating (AC)=550V, Min Operating Temperature=-55°C, Package Quantity=1, Connector Type=Header, Contact Finish - Mating=GOLD, Contact Material=Bronze, Contact Mating Length=0.23inch, Contact Plating=Gold, Contact Shape=Square, Contact Type="Male Pin", Depth=2.54mm, Fastening Type=Pull, Gender=Male, Housing Color=Black, Housing Material=Polyester, Insulation Color=Black, Insulation Material=PBT, Length=5.08mm, Mount="Through Hole", Number Of Contacts=2, Number of Positions=2, Number of Rows=1, Orientation=Straight, Packaging=Bulk, Pitch=2.54mm, Radiation Hardening=No, REACH SVHC="No SVHC", RoHS Compliant=Yes, Series=TSW, Termination=Solder
J9: library part CON_HEADM_1X3, "0.025\" SQ Post Header, Through-hole, Vertical, -55 to 125 degC, 2.54 mm Pitch, 3-Pin, Male, RoHS", Manufacturer=Samtec, Temperature Range="-55 to 125 degC", ComponentLink1Description="Manufacturer URL", ComponentLink1URL=http://www.samtec.com, ComponentLink2Description=Datasheet, ComponentLink2URL=http://www.samtec.com/documents/webfiles/pdf/TSW_TH.PDF, ComponentLink3Description="Package Specification", ComponentLink3URL=http://www.samtec.com/documents/webfiles/cpdf/TSW-XXX-XX-XXX-X-XX-XXX-MKT.pdf, DatasheetVersion=F-214, Mounting Technology=Through-hole, Orientation=Vertical, PackageDescription=".025[0.64] SQ. Post Terminal Strip Assembly", PackageReference=TSW-103-07-X-S, PackageVersion="DM, 8/1988", PartNumber=TSW-103-07-F-S, Pitch="2.54 mm", RoHS=True
J10: library part CON_PWR_24V_5A, "Power Barrel Connector Jack 2.00mm ID (0.079\"), 5.50mm OD (0.217\") Through Hole, Right Angle", Package=None, Check_prices=https://www.snapeda.com/parts/PJ-102AH/Same+Sky/view-part/?ref=eda, MF="Same Sky", MP=PJ-102AH, SnapEDA_Link=https://www.snapeda.com/parts/PJ-102AH/Same+Sky/view-part/?ref=snap
R2: library part RES_0R00_0603, "RES SMD 0 OHM JUMPER 1/10W 0603", Manufacturer=Yageo, Manufacturer Part Number=RC0603FR-070RL, Package=RC0603, Power Rating=0.1W, Resistance=0Ω, Temperature="-55°C to +155°C", Temperature Range High=+155°C, Temperature Range Low=-55°C, Tolerance=1%, Voltage Rating=75V, Automotive=No, Category=Res, ComponentLink2Description=Datasheet, ComponentLink2URL=http://www.yageo.com/documents/recent/PYu-RC_Group_51_RoHS_L_10.pdf, Composition="Thick Film", Device Class L1="Passive Components", Device Class L2=Resistors, Device Class L3="Chip SMD Resistors", Digikey Description="RES SMD 0 OHM JUMPER 1/10W 0603", Footprint Url=http://www.yageo.com/exep/pages/download/literatures/PYu-R_Mount_10.pdf, Height=0.55mm, Ipc Land Pattern Name=RESC16080X45, Lead Free=Yes, Mouser Description="RC Series 0603 0.1 W 0 O Jumper Surface Mount Thick Film Chip Resistor", Octopart=https://octopart.com/rc0603fr-070rl-yageo-1180803, RoHS=TRUE, Series=RC_L
R3 R4 R5 R6: library part RES_10K0_0603, "RES 10K OHM 1% 1/10W 0603", Case Code (Imperial)=0603, Case Code (Metric)=1608, Max Operating Temperature=155°C, Max Power Dissipation=100mW, Min Operating Temperature=-55°C, Resistance=10kR, Resistance Tolerance=1%, Resistor Type="Thick Film", Temperature Coefficient=100ppm/°C, Voltage Rating=75V, Voltage Rating (DC)=50V, Case/Package=0603, Construction=Rectangular, Depth=0.8mm, Features="Moisture Resistant", Height=0.45mm, Lead Free="Lead Free", Lead Pitch=0.3mm, Length=1.6mm, Military Standard=Not, Number of Pins=2, Number of Terminations=2, Packaging="Tape and Reel", Power Rating=100mW, RoHS Compliant=Yes, Series=RC, Size Code=0603, Termination=SMD/SMT, Tolerance=1%, Weight=7.1E-05oz, Width=0.8mm
S1: library part SW_DIP_4_SMT, "Dip Switch SPST 4 Position Surface Mount Slide (Standard) Actuator 25mA 24VDC", Package=None, Check_prices=https://www.snapeda.com/parts/DS04-254-2-04BK-SMT-TR/Same+Sky/view-part/?ref=eda, MF="Same Sky", MP=DS04-254-2-04BK-SMT-TR, SnapEDA_Link=https://www.snapeda.com/parts/DS04-254-2-04BK-SMT-TR/Same+Sky/view-part/?ref=snap
U1_A U1_B U1_C U1_D U1_E U1_F U1_G U1_H: library part CMP-04872-000210-1, "IC TRANSCEIVER HALF 4/1 20TSSOP", Case/Package=TSSOP, Max Operating Temperature=85°C, Max Supply Current=35mA, Max Supply Voltage=3.6V, Min Operating Temperature=-40°C, Min Supply Voltage=3V, Operating Supply Voltage=3.3V, Output Voltage=2.4V, Package Quantity=70, Power Dissipation=774mW, Data Rate=125Mbps, Height=1.15mm, Lead Free="Lead Free", Length=6.5mm, Logic Function=Buffer, Mount="Surface Mount", Nominal Supply Current=35mA, Number of Drivers=1, Number of Elements=1, Number of Pins=20, Number of Receivers=4, Number of Transceivers=1, Number of Transmitters=4, Operating Supply Current=35mA, Packaging=Rail/Tube, Propagation Delay=3.8ns, Radiation Hardening=No, REACH SVHC="No SVHC", RoHS Compliant=Yes, Series=65LVDT, Supply Current=35mA, Turn-On Delay Time=3.8ns, Weight=0.002716oz, Width=4.4mm

## Free pads (board coordinates)
  round 5 hole 2.5: MH(6.35,6.604) MH(6.35,159.004) MH(8.172,60.804) MH(8.172,104.804) MH(77.172,60.804) MH(77.172,104.804) MH(145.542,6.604) MH(145.542,159.004)

## Via types
v1: diameter 0.508, hole 0.203, Top to Bottom, 190 vias
v2: diameter 0.61, hole 0.305, Top to Bottom, 154 vias
v3: diameter 0.813, hole 0.406, Top to Bottom, 38 vias

## Nets (pads, with @x,y where several pads share a name; then routed paths per layer and width w, separated by ;. In a path a pad name is that pad's centre, name@x,y a point inside that pad or via, vN(x,y) a via of type N, cw(c..) or ccw(c..) an arc to the next point about the centre after c; other vN are vias at no path point)
1V0: J2.04 J2.06 J3.04 J3.06 | length 51.1
  Top w0.305: J2.04@39.877,99.716 J2.06@40.677,99.716 ; v2(39.878,96.52) J2.04@39.877,99.716
  Bottom w0.305: J3.06@12.065,124.714 J3.04@9.525,124.714 9.525,120.396 33.401,96.52 v2(39.878,96.52)
1V8: J2.07 J3.07 | length 39.2
  Top w0.305: J3.07@14.605,127.254 16.002,125.857 16.002,123.47 27.204,112.268 38.608,112.268 41.477,109.399 J2.07@41.477,105.888
3V3: C1_A.1 C1_B.1 C1_C.1 C1_D.1 C1_E.1 C1_F.1 C1_G.1 C1_H.1 C2_A.2 C2_B.2 C2_C.2 C2_D.2 C2_E.2 C2_F.2 C2_G.2 C2_H.2 C3_A.1 C3_B.1 C3_C.1 C3_D.1 C3_E.1 C3_F.1 C3_G.1 C3_H.1 C4_A.1 C4_B.1 C4_C.1 C4_D.1 C4_E.1 C4_F.1 C4_G.1 C4_H.1 J1_A.A4 J1_A.A9 J1_A.B4 J1_A.B9 J1_B.A4 J1_B.A9 J1_B.B4 J1_B.B9 J1_C.A4 J1_C.A9 J1_C.B4 J1_C.B9 J1_D.A4 J1_D.A9 J1_D.B4 J1_D.B9 J1_E.A4 J1_E.A9 J1_E.B4 J1_E.B9 J1_F.A4 J1_F.A9 J1_F.B4 J1_F.B9 J1_G.A4 J1_G.A9 J1_G.B4 J1_G.B9 J1_H.A4 J1_H.A9 J1_H.B4 J1_H.B9 J2.09 J2.11 J2.13 J3.09 J3.11 J3.13 J5.02 J5.04 J5.06 J7.02 J7.04 J7.06 R3.2 R4.2 R5.2 R6.2 U1_A.4 U1_A.8 U1_B.4 U1_B.8 U1_C.4 U1_C.8 U1_D.4 U1_D.8 U1_E.4 U1_E.8 U1_F.4 U1_F.8 U1_G.4 U1_G.8 U1_H.4 U1_H.8 | length 128.4
  Top w0.254: J1_A.A4@143.063,19.578 143.086,19.601 144.246,19.601 J1_A.B9@144.273,19.628 ; J1_A.A9@143.063,22.078 143.086,22.055 144.246,22.055 J1_A.B4@144.273,22.028 ; J1_B.A4@143.086,37.381 J1_B.B9@144.246,37.381 ; J1_B.A9@143.086,39.835 J1_B.B4@144.246,39.835 ; J1_C.A4@143.086,55.161 J1_C.B9@144.246,55.161 ; J1_C.A9@143.086,57.615 J1_C.B4@144.246,57.615 ; J1_D.A4@143.086,72.941 J1_D.B9@144.246,72.941 ; J1_D.A9@143.086,75.395 J1_D.B4@144.246,75.395 ; J1_E.A4@143.086,90.721 J1_E.B9@144.246,90.721 ; J1_E.A9@143.086,93.175 J1_E.B4@144.246,93.175 ; J1_F.A4@143.086,108.501 J1_F.B9@144.246,108.501 ; J1_F.A9@143.086,110.955 J1_F.B4@144.246,110.955 ; J1_G.A4@143.086,126.281 J1_G.B9@144.246,126.281 ; J1_G.A9@143.086,128.735 J1_G.B4@144.246,128.735 ; J1_H.A4@143.086,144.061 J1_H.B9@144.246,144.061 ; J1_H.A9@143.086,146.515 J1_H.B4@144.246,146.515
  Top w0.305: J2.09@42.277,105.888 v2(42.277,108.282) ; J2.11@43.077,105.888 v2(43.077,109.22) ; J2.13@43.877,105.888 v2(43.877,108.282) ; v2(69.85,154.386) 69.863,154.399 73.084,154.399 R6.2@73.097,154.412 ; v2(70.104,133.3) R3.2@73.097,133.3 ; R4.2@76.399,133.274 v2(79.248,133.274) ; R5.2@76.399,154.386 76.43,154.417 79.978,154.417 v2(80.01,154.449) ; v2(123.952,24.13) C2_A.2@123.952,26.097 ; v2(123.952,41.91) C2_B.2@123.952,43.877 ; v2(123.952,59.69) C2_C.2@123.952,61.657 ; v2(123.952,77.47) C2_D.2@123.952,79.437 ; v2(123.952,95.25) C2_E.2@123.952,97.217 ; v2(123.952,113.061) C2_F.2@123.952,114.997 ; v2(123.952,130.81) C2_G.2@123.952,132.777 ; v2(123.952,148.59) C2_H.2@123.952,150.557 ; C1_A.1@128.016,26.247 128.101,26.162 v2(130.302,26.162) ; C1_B.1@128.016,44.027 128.101,43.942 v2(130.302,43.942) ; C1_C.1@128.016,61.807 128.101,61.722 v2(130.302,61.722) ; C1_D.1@128.016,79.587 128.101,79.502 v2(130.302,79.502) ; C1_E.1@128.016,97.367 128.101,97.282 v2(130.302,97.282) ; C1_F.1@128.016,115.147 128.101,115.062 v2(130.302,115.062) ; C1_G.1@128.016,132.927 128.101,132.842 v2(130.302,132.842) ; C1_H.1@128.016,150.707 128.101,150.622 v2(130.302,150.622) ; U1_A.4@131.553,18.484 v2(133.063,18.484) ; U1_A.8@131.553,21.084 131.56,21.077 133.063,21.077 v2(133.096,21.044) ; U1_B.4@131.553,36.264 v2(133.063,36.264) ; U1_B.8@131.553,38.864 131.56,38.857 133.063,38.857 v2(133.096,38.824) ; U1_C.4@131.553,54.044 v2(133.063,54.044) ; U1_C.8@131.553,56.644 131.56,56.637 133.063,56.637 v2(133.096,56.604) ; U1_D.4@131.553,71.824 v2(133.063,71.824) ; U1_D.8@131.553,74.424 131.56,74.417 133.063,74.417 v2(133.096,74.384) ; U1_E.4@131.553,89.604 v2(133.063,89.604) ; U1_E.8@131.553,92.204 131.56,92.197 133.063,92.197 v2(133.096,92.164) ; U1_F.4@131.553,107.384 v2(133.063,107.384) ; U1_F.8@131.553,109.984 131.56,109.977 133.063,109.977 v2(133.096,109.944) ; U1_G.4@131.553,125.164 v2(133.063,125.164) ; U1_G.8@131.553,127.764 131.56,127.757 133.063,127.757 v2(133.096,127.724) ; U1_H.4@131.553,142.944 v2(133.063,142.944) ; U1_H.8@131.553,145.544 131.56,145.537 133.063,145.537 v2(133.096,145.504) ; C3_A.1@143.763,13.208 143.764,13.207 v2(143.764,11.43) ; C3_B.1@143.763,30.988 143.764,30.987 v2(143.764,29.21) ; C3_C.1@143.763,48.768 143.764,48.767 v2(143.764,46.99) ; C3_D.1@143.763,66.548 143.764,66.547 v2(143.764,64.77) ; C3_E.1@143.763,84.328 143.764,84.327 v2(143.764,82.55) ; C3_F.1@143.763,102.108 143.764,102.107 v2(143.764,100.33) ; C3_G.1@143.763,119.888 143.764,119.887 v2(143.764,118.11) ; C3_H.1@143.763,137.668 143.764,137.667 v2(143.764,135.89) ; C4_A.1@146.997,13.208 146.998,13.207 v2(146.998,11.43) ; C4_B.1@146.997,30.988 146.998,30.987 v2(146.998,29.21) ; C4_C.1@146.997,48.768 146.998,48.767 v2(146.998,46.99) ; C4_D.1@146.997,66.548 146.998,66.547 v2(146.998,64.77) ; C4_E.1@146.997,84.328 146.998,84.327 v2(146.998,82.55) ; C4_F.1@146.997,102.108 146.998,102.107 v2(146.998,100.33) ; C4_G.1@146.997,119.888 146.998,119.887 v2(146.998,118.11) ; C4_H.1@146.997,137.668 146.998,137.667 v2(146.998,135.89)
  Top w0.406: J7.02@39.077,59.716 J7.04@39.877,59.716 J7.06@40.677,59.716
  other v3: 38.95,56.718 40.005,57.803
5V0: C5.1 C6.1 C7.1 C8.1 C9.1 J2.01 J2.03 J2.05 J3.01 J3.03 J3.05 J9.2 J10.1 | length 1.6
  Top w0.406: J2.01@39.077,105.888 J2.03@39.877,105.888 J2.05@40.677,105.888
board_mode_0: J2.32 J3.32 R3.1 S1.4A | length 72.6
  Top w0.203: v2(51.077,97.79) J2.32@51.077,99.716 ; v1(63.246,139.954) 73.158,139.954 S1.4A@73.219,139.893 73.219,134.976 R3.1@73.097,134.854
  Bottom w0.203: v2(51.077,97.79) 51.077,106.065 50.186,106.955 50.186,119.613 J3.32@45.085,124.714 46.277,125.906 46.277,128.778 48.309,130.81 54.102,130.81 v1(63.246,139.954)
board_mode_1: J2.34 J3.34 R4.1 S1.3A | length 77.4
  Top w0.203: v2(51.877,96.774) J2.34@51.877,99.716 ; v1(65.024,142.433) S1.3A@73.219,142.433 ; S1.3A@73.419,142.433 76.399,139.453 R4.1@76.399,134.828
  Bottom w0.203: v2(51.877,96.774) 51.877,106.304 51.077,107.104 51.077,121.262 J3.34@47.625,124.714 48.768,125.857 48.768,128.232 50.33,129.794 55.118,129.794 65.024,139.7 v1(65.024,142.433)
board_mode_2: J2.38 J3.38 R5.1 S1.2A | length 73.6
  Top w0.203: v2(53.477,96.774) J2.38@53.477,99.716 ; v1(67.31,144.973) S1.2A@73.219,144.973 ; S1.2A@73.419,144.973 76.399,147.953 R5.1@76.399,152.832
  Bottom w0.203: v2(53.477,96.774) 53.477,123.917 52.705,124.689 J3.38@52.705,124.714 53.848,125.857 53.848,127.762 55.118,129.032 56.991,129.032 67.31,139.351 v1(67.31,144.973)
board_mode_3: J2.40 J3.40 R6.1 S1.1A | length 67.2
  Top w0.203: v2(54.277,97.79) J2.40@54.277,99.716 ; v1(69.342,147.513) S1.1A@73.219,147.513 73.219,152.736 R6.1@73.097,152.858
  Bottom w0.203: v2(54.277,97.79) 54.277,123.746 J3.40@55.245,124.714 69.342,138.811 v1(69.342,147.513)
C\S\_A: J7.16 U1_A.1 | length 120.4
  Top w0.203: J7.16@44.677,59.716 44.677,54.891 58.166,41.402 112.171,41.402 114.808,38.765 114.808,25.641 v1(123.952,16.497) ; U1_A.1@131.553,16.534 v1(134.112,16.534)
  Bottom w0.203: v1(123.952,16.497) 123.97,16.516 134.094,16.516 v1(134.112,16.534)
C\S\_A_N: J1_A.A3 J1_A.B3 U1_A.19 | length 37.8
  Top w0.16: U1_A.19@126.003,17.184 126.559,17.184 126.74,17.003 128.183,17.003 130.454,14.732 134.621,14.732 136.171,16.282 136.171,17.953 137.181,18.963 139.911,18.963 140.138,19.19 140.278,19.19 140.531,18.937 141.487,18.937 141.522,18.972 142.384,18.972 142.475,19.062 143.047,19.062 J1_A.A3@143.063,19.078
  Bottom w0.16: v1(140.229,19.19) 140.28,19.19 140.604,18.866 140.834,18.866 141.445,19.477 141.445,24.757 143.137,26.449 145.407,26.449 146.337,25.519 146.337,23.387 145.635,22.684 145.361,22.684 145.105,22.428 J1_A.B3@144.973,22.428
C\S\_A_P: J1_A.A2 J1_A.B2 U1_A.20 | length 36.8
  Top w0.16: U1_A.20@126.003,16.534 126.559,16.534 126.74,16.716 128.064,16.716 130.335,14.445 134.74,14.445 136.458,16.163 136.458,17.834 137.3,18.676 139.911,18.676 140.159,18.428 140.299,18.428 140.521,18.65 141.606,18.65 141.641,18.684 142.384,18.684 142.475,18.594 143.047,18.594 J1_A.A2@143.063,18.578
  Bottom w0.16: v1(140.208,18.428) 140.302,18.428 140.453,18.579 140.953,18.579 141.732,19.358 141.732,24.638 143.256,26.162 145.288,26.162 146.05,25.4 146.05,23.506 145.516,22.972 145.361,22.972 145.105,23.228 J1_A.B2@144.973,23.228
C\S\_B: J7.28 U1_B.1 | length 100.3
  Top w0.203: J7.28@49.477,59.716 49.477,55.425 60.452,44.45 113.779,44.45 v1(123.952,34.277) ; U1_B.1@131.553,34.314 v1(134.112,34.314)
  Bottom w0.203: v1(123.952,34.277) 123.97,34.296 134.094,34.296 v1(134.112,34.314)
C\S\_B_N: J1_B.A3 J1_B.B3 U1_B.19 | length 37.8
  Top w0.16: U1_B.19@126.003,34.964 126.559,34.964 126.74,34.783 128.183,34.783 130.454,32.512 134.621,32.512 136.171,34.062 136.171,35.733 137.181,36.743 139.911,36.743 140.138,36.97 140.278,36.97 140.531,36.717 141.487,36.717 141.522,36.752 142.384,36.752 142.475,36.842 143.047,36.842 J1_B.A3@143.063,36.858
  Bottom w0.16: v1(140.229,36.97) 140.28,36.97 140.604,36.646 140.834,36.646 141.445,37.257 141.445,42.537 143.137,44.229 145.407,44.229 146.337,43.299 146.337,41.167 145.635,40.464 145.361,40.464 145.105,40.208 J1_B.B3@144.973,40.208
C\S\_B_P: J1_B.A2 J1_B.B2 U1_B.20 | length 36.8
  Top w0.16: U1_B.20@126.003,34.314 126.559,34.314 126.74,34.496 128.064,34.496 130.335,32.225 134.74,32.225 136.458,33.943 136.458,35.614 137.3,36.456 139.911,36.456 140.159,36.208 140.299,36.208 140.521,36.43 141.606,36.43 141.641,36.464 142.384,36.464 142.475,36.374 143.047,36.374 J1_B.A2@143.063,36.358
  Bottom w0.16: v1(140.208,36.208) 140.302,36.208 140.453,36.359 140.953,36.359 141.732,37.138 141.732,42.418 143.256,43.942 145.288,43.942 146.05,43.18 146.05,41.286 145.516,40.752 145.361,40.752 145.105,41.008 J1_B.B2@144.973,41.008
C\S\_C: J7.42 U1_C.1 | length 91.2
  Top w0.203: J7.42@55.077,59.716 55.077,55.159 62.738,47.498 118.098,47.498 122.658,52.057 v1(123.952,52.057) ; U1_C.1@131.553,52.094 v1(134.112,52.094)
  Bottom w0.203: v1(123.952,52.057) 123.97,52.076 134.094,52.076 v1(134.112,52.094)
C\S\_C_N: J1_C.A3 J1_C.B3 U1_C.19 | length 37.8
  Top w0.16: U1_C.19@126.003,52.744 126.559,52.744 126.74,52.563 128.183,52.563 130.454,50.292 134.621,50.292 136.171,51.842 136.171,53.513 137.181,54.523 139.911,54.523 140.138,54.75 140.278,54.75 140.531,54.497 141.487,54.497 141.522,54.532 142.384,54.532 142.475,54.622 143.047,54.622 J1_C.A3@143.063,54.638
  Bottom w0.16: v1(140.229,54.75) 140.28,54.75 140.604,54.426 140.834,54.426 141.445,55.037 141.445,60.317 143.137,62.009 145.407,62.009 146.337,61.079 146.337,58.947 145.635,58.244 145.361,58.244 145.105,57.988 J1_C.B3@144.973,57.988
C\S\_C_P: J1_C.A2 J1_C.B2 U1_C.20 | length 36.8
  Top w0.16: U1_C.20@126.003,52.094 126.559,52.094 126.74,52.276 128.064,52.276 130.335,50.005 134.74,50.005 136.458,51.723 136.458,53.394 137.3,54.236 139.911,54.236 140.159,53.988 140.299,53.988 140.521,54.21 141.606,54.21 141.641,54.244 142.384,54.244 142.475,54.154 143.047,54.154 J1_C.A2@143.063,54.138
  Bottom w0.16: v1(140.208,53.988) 140.302,53.988 140.453,54.139 140.953,54.139 141.732,54.918 141.732,60.198 143.256,61.722 145.288,61.722 146.05,60.96 146.05,59.066 145.516,58.532 145.361,58.532 145.105,58.788 J1_C.B2@144.973,58.788
C\S\_D: J7.54 U1_D.1 | length 90.4
  Top w0.203: J7.54@59.877,59.716 59.877,56.709 66.04,50.546 103.444,50.546 122.735,69.837 v1(123.952,69.837) ; U1_D.1@131.553,69.874 v1(134.112,69.874)
  Bottom w0.203: v1(123.952,69.837) 123.97,69.856 134.094,69.856 v1(134.112,69.874)
C\S\_D_N: J1_D.A3 J1_D.B3 U1_D.19 | length 37.8
  Top w0.16: U1_D.19@126.003,70.524 126.559,70.524 126.74,70.343 128.183,70.343 130.454,68.072 134.621,68.072 136.171,69.622 136.171,71.293 137.181,72.303 139.911,72.303 140.138,72.53 140.278,72.53 140.531,72.277 141.487,72.277 141.522,72.312 142.384,72.312 142.475,72.402 143.047,72.402 J1_D.A3@143.063,72.418
  Bottom w0.16: v1(140.229,72.53) 140.28,72.53 140.604,72.206 140.834,72.206 141.445,72.817 141.445,78.097 143.137,79.789 145.407,79.789 146.337,78.859 146.337,76.727 145.635,76.024 145.361,76.024 145.105,75.768 J1_D.B3@144.973,75.768
C\S\_D_P: J1_D.A2 J1_D.B2 U1_D.20 | length 36.8
  Top w0.16: U1_D.20@126.003,69.874 126.559,69.874 126.74,70.056 128.064,70.056 130.335,67.785 134.74,67.785 136.458,69.503 136.458,71.174 137.3,72.016 139.911,72.016 140.159,71.768 140.299,71.768 140.521,71.99 141.606,71.99 141.641,72.024 142.384,72.024 142.475,71.934 143.047,71.934 J1_D.A2@143.063,71.918
  Bottom w0.16: v1(140.208,71.768) 140.302,71.768 140.453,71.919 140.953,71.919 141.732,72.698 141.732,77.978 143.256,79.502 145.288,79.502 146.05,78.74 146.05,76.846 145.516,76.312 145.361,76.312 145.105,76.568 J1_D.B2@144.973,76.568